# Altium PCB LoRaGW_MiniPCIe.PcbDoc (part 1 of 3)
Units mm, origin at the board's own origin, x right, y up, seen from the top; angles counter-clockwise.
Board outline 30.02 x 79.66 mm, 4 copper layers (Top Layer, GND, PWR, Bottom Layer), stack 1.586 mm thick; 138 components, 116 nets, 568 pads, 433 vias.
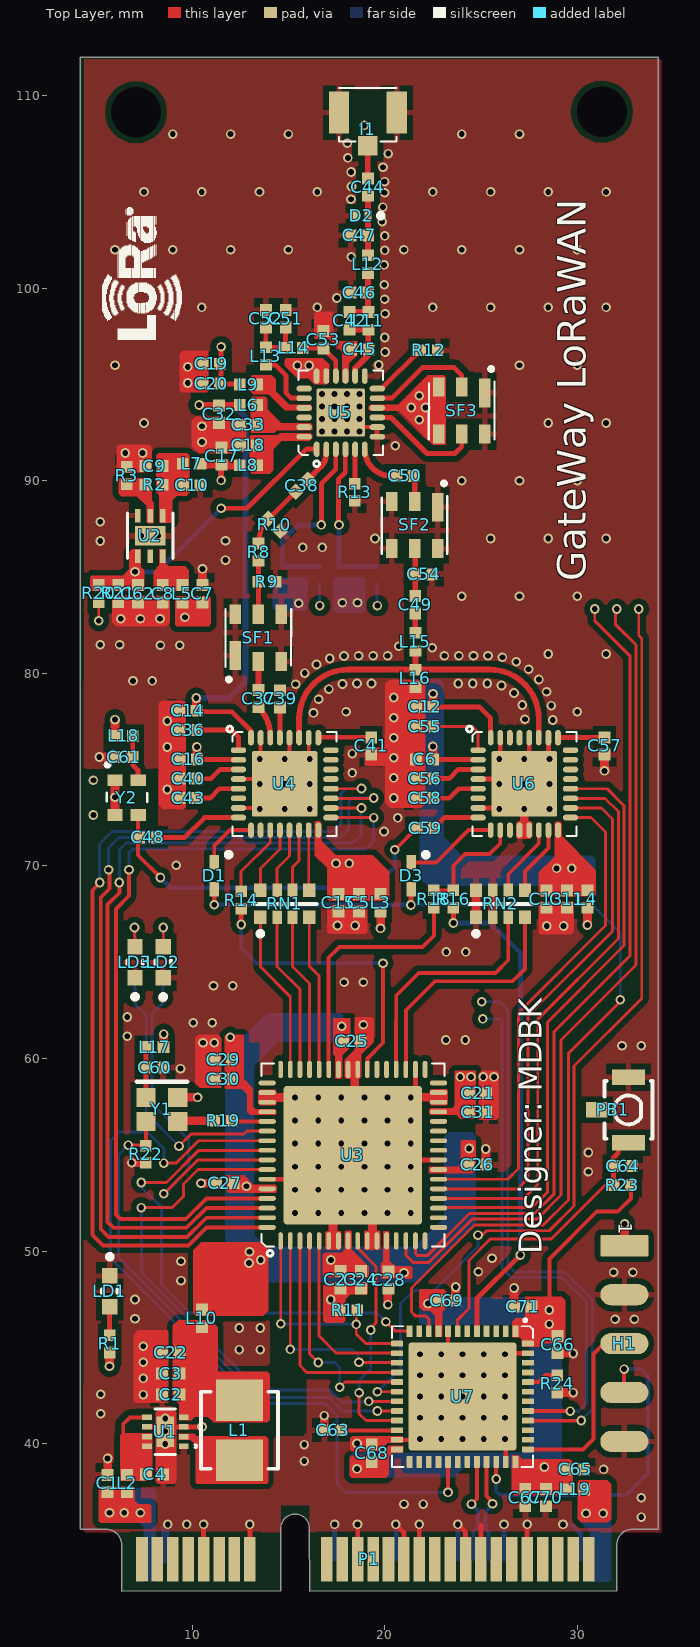
[diagram p0: Top Layer view]
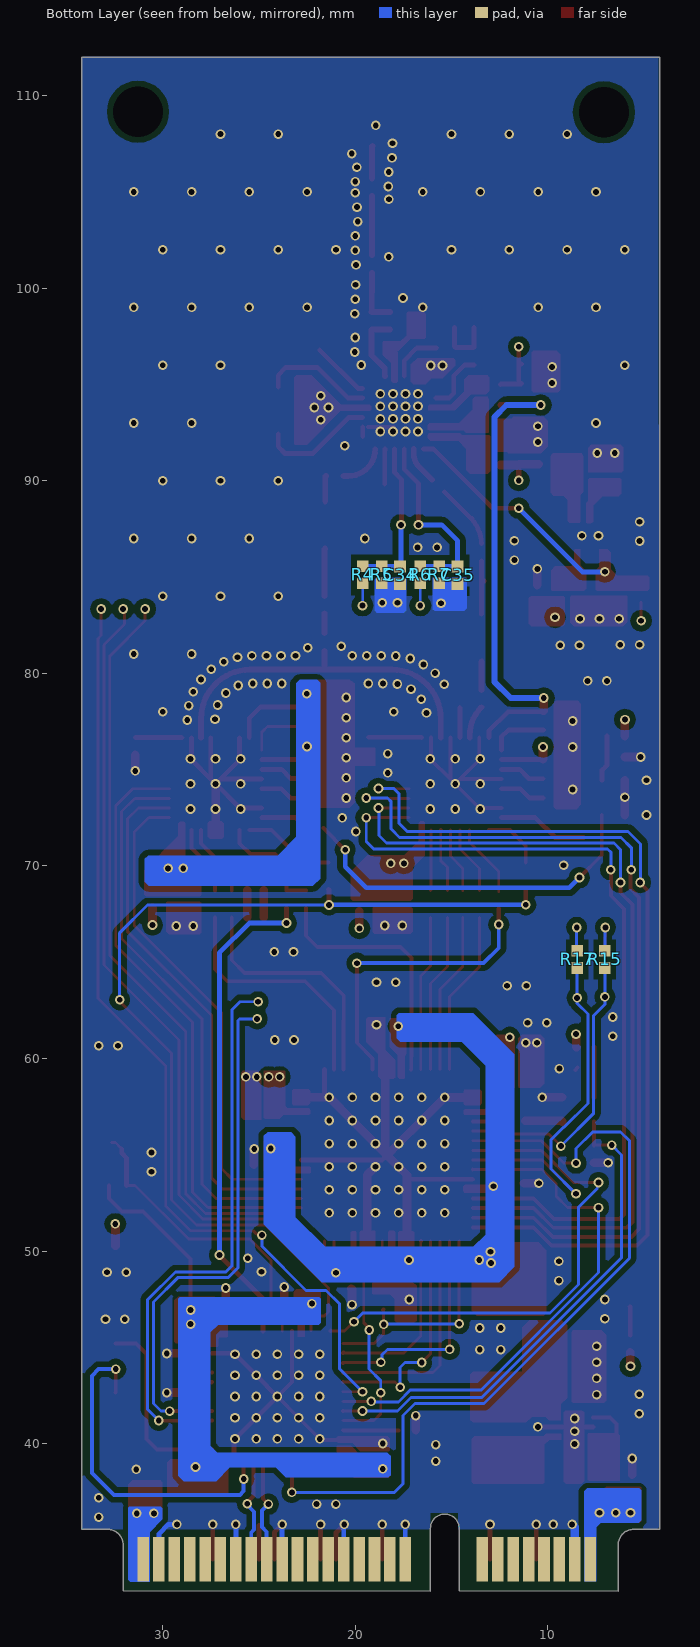
[diagram p1: Bottom Layer view, seen from below]
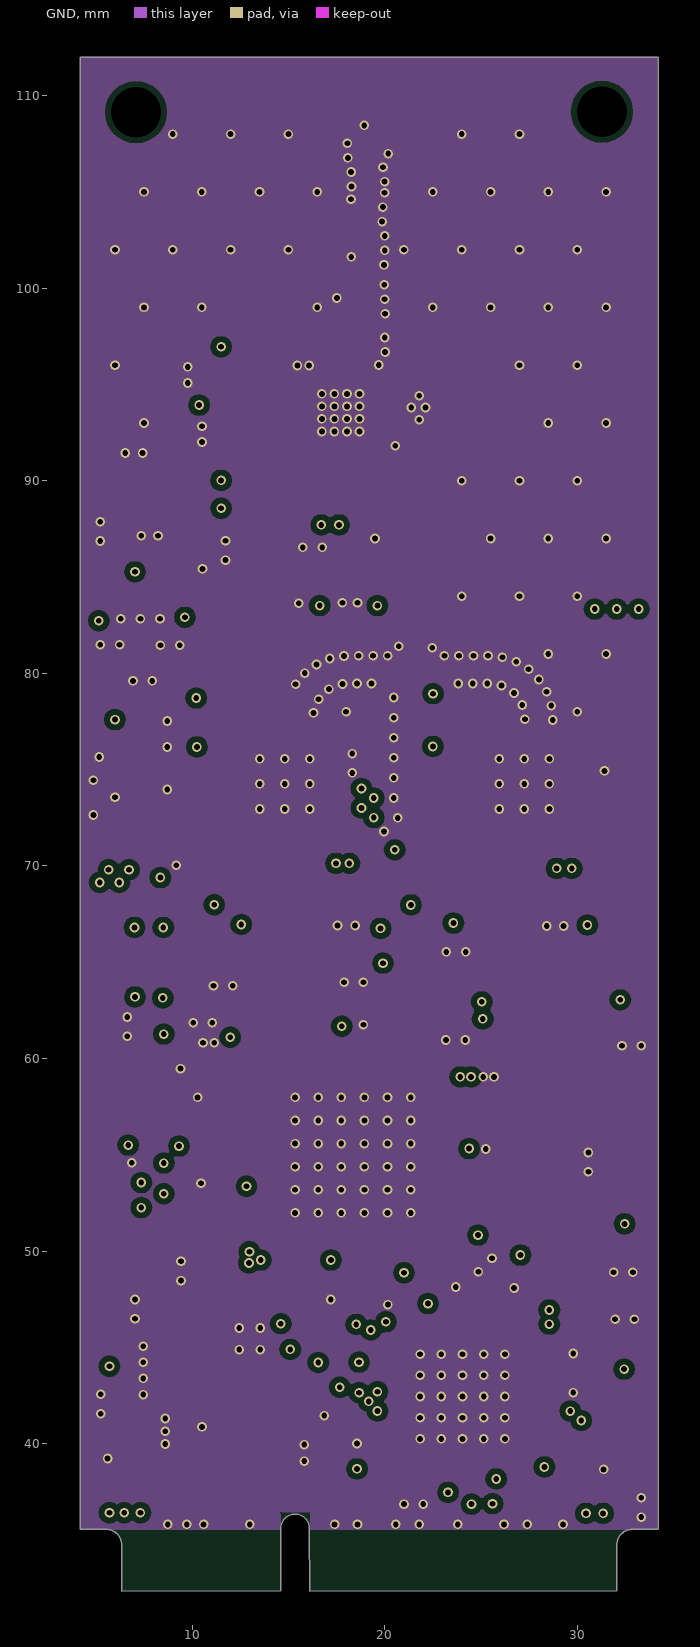
[diagram p2: GND]
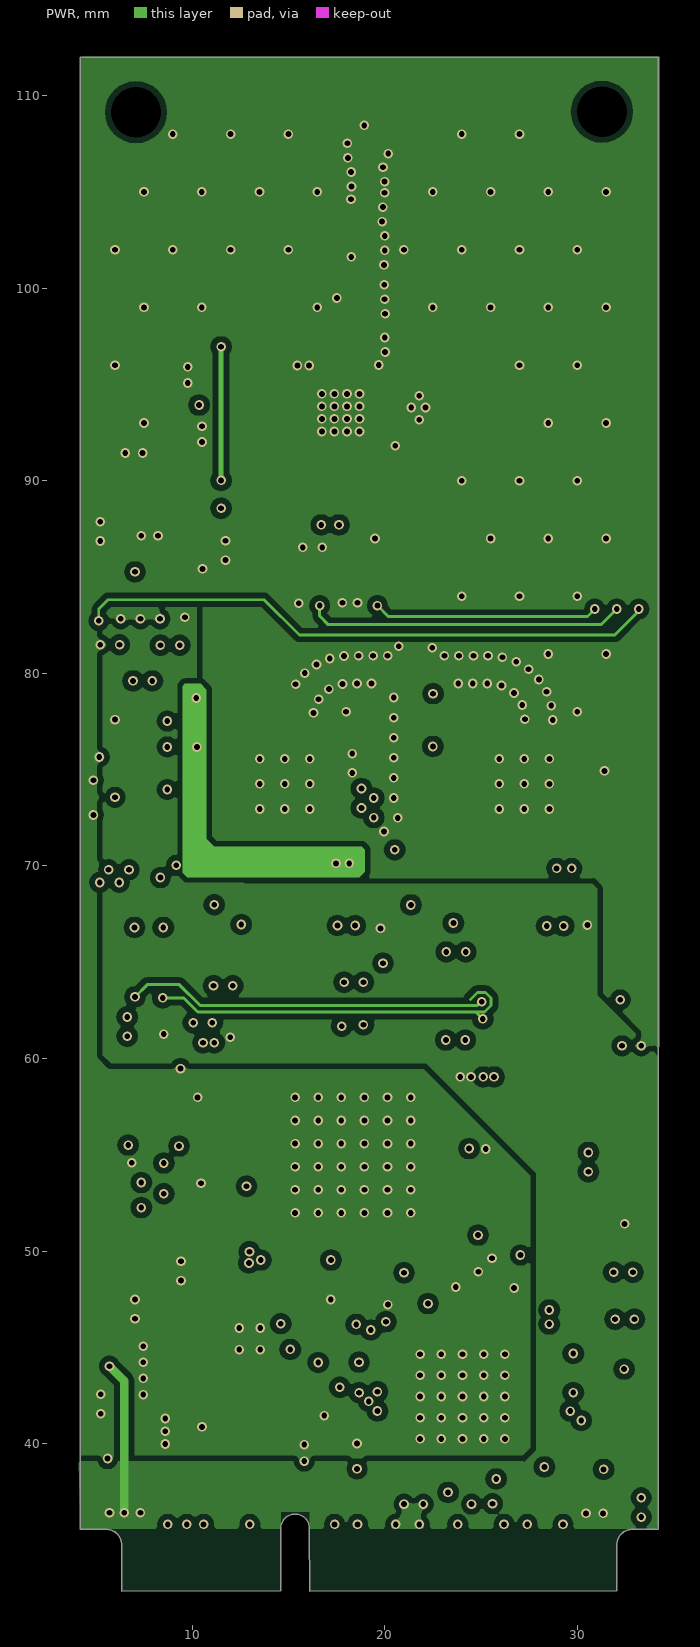
[diagram p3: PWR]
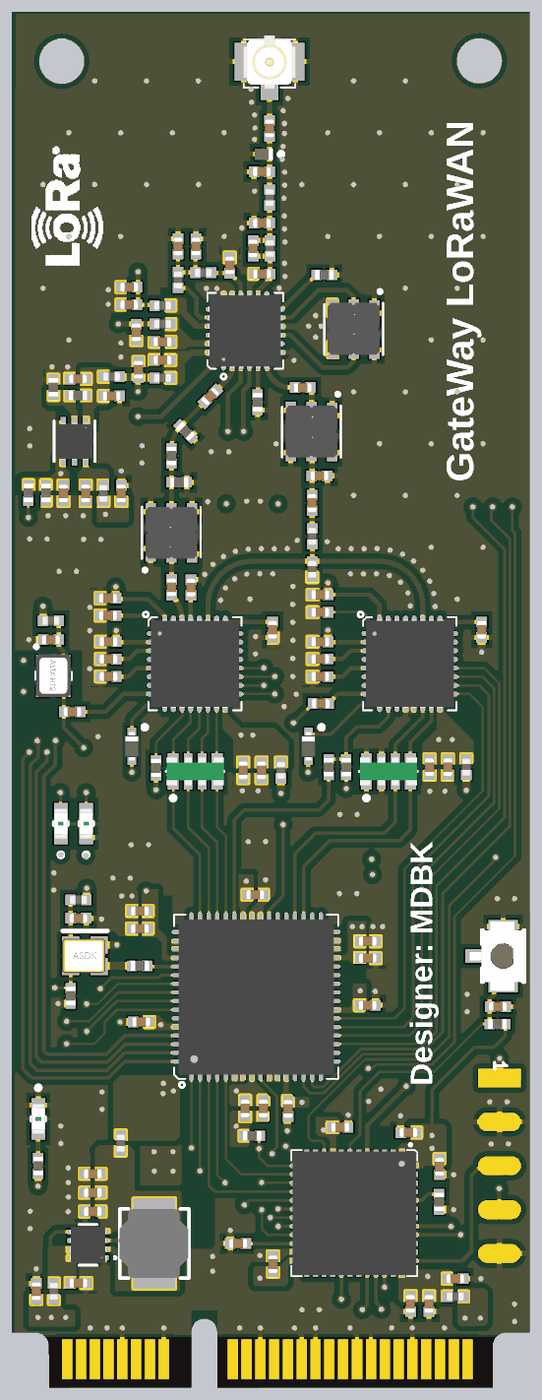
[diagram p5: 3D render of the assembled board from above, using the file's embedded part models]
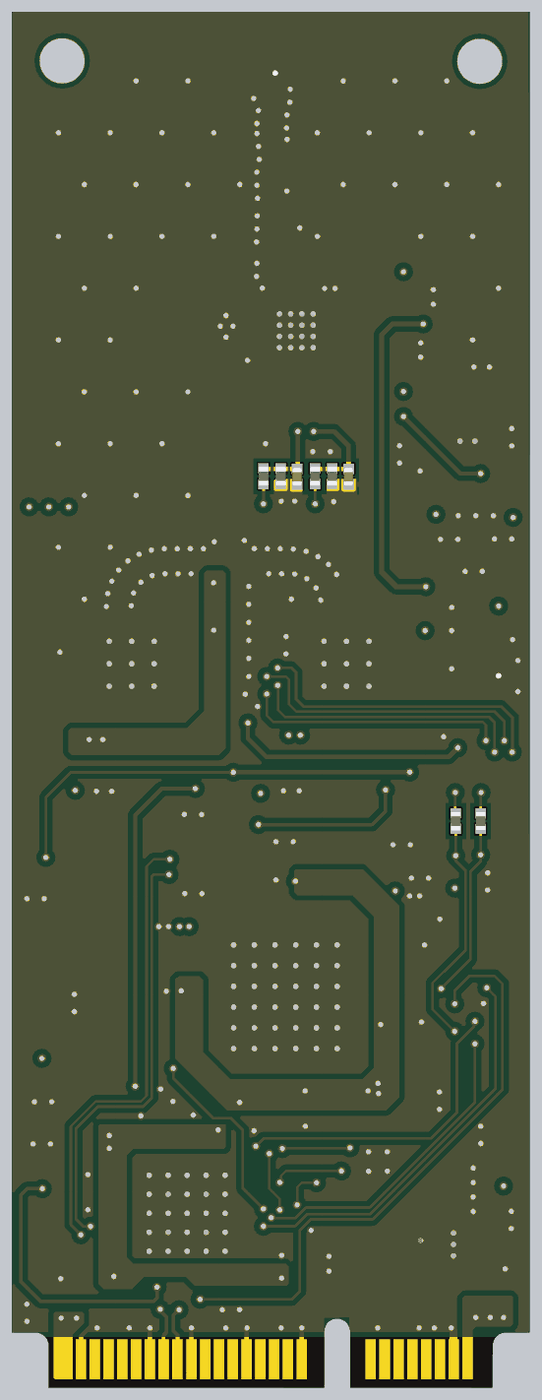
[diagram p6: 3D render of the assembled board from below, using the file's embedded part models]

## Layer stack, top to bottom
Top Solder: solder mask 0.01, SM-001, Dk 4.6
Top Layer: signal copper 0.035
Dielectric 1: core 0.15, FR-4, Dk 4.6
GND: signal copper 0.018
Dielectric 3: prepreg 1.18, FR-4, Dk 4.6
PWR: signal copper 0.018
Dielectric 5: core 0.15, FR-4, Dk 4.6
Bottom Layer: signal copper 0.035
Bottom Solder: solder mask 0.01, SM-001, Dk 4.6

## Board outline
6.35,32.343 6.343,34.75 ccw(c5.55,34.75) 5.55,35.543 4.2,35.543 4.189,111.996 34.196,112.003 34.207,35.55 32.85,35.543 ccw(c32.85,34.75) 32.057,34.75 32.057,32.35 16.1,32.343 16.093,35.6 ccw(c15.35,35.6) 14.607,35.6 14.607,32.35

## Design rules (kind name [scope] priority, off if disabled: settings)
Clearance [All] p1: gap=0.15 ignorepadtopadclearanceinfootprint=FALSE except(0: Arc-Hole Track-Hole SMDPad-Hole THPad-Hole Via-Hole Fill-Hole Poly-Hole Region-Hole Text-Hole; 0.3: Arc-Poly Track-Poly SMDPad-Poly THPad-Poly Via-Poly Fill-Poly Poly-Poly Poly-Region)
ComponentClearance [All] p1: gap=0.1 collisioncheckmode=3 verticalgap=0.1 showdistances=FALSE
PlaneClearance [All] p1: clearance=0.3
PlaneConnect [All] p1: planeconnectstyle=Relief reliefexpansion=0.2 reliefentries=4 reliefconductorwidth=0.3 reliefairgap=0.2
PolygonConnect PolygonConnect_1 [isvia or InComponent('J4') or InComponent('J5')] p1: connectstyle=Direct reliefconductorwidth=0.3 reliefentries=4 polygonreliefangle="90 Angle" airgapwidth=0.3
PolygonConnect [All] p2: connectstyle=Relief reliefconductorwidth=0.3 reliefentries=4 polygonreliefangle="90 Angle" airgapwidth=0.3
RoutingVias [All] p1: holewidth=0.45 width=0.254 viastyle="Through Hole" minholewidth=0.152 minwidth=0.254 maxholewidth=0.6 maxwidth=1.1
SolderMaskExpansion [All] p1: expansion=0.102
Width [All] p1: maxlimit=1.5 minlimit=0.15 preferedwidth=0.2
27 further rules are at their usual default settings.

## Classes and differential pairs
component class [03].PCIe: C63 C64 C66 C68 C69 C70 C71 DS1 H1 L19 P1 PB1 R1 R20 R23 U7
component class [02].LORA: C11 C14 C16 C17 C19 C21 C22 C24 C27 C29 C30 C32 C35 C37 C38 C43 C44 C46 C49 C51 C52 C54 C57 C63 C64 C66 C69 D1 D2 D3 I1 L6 L7 L8 L9 L10 L11 L12 L13 L14 L15 L16 L17 L18 LD2 LD3 R4 R7 R9 R12 R14 R17 R20 RN1 RN2 SF1 SF2 SF3 U3 U4 U5 U6 Y1 Y2
component class [01].PSU: C4 C6 C8 C11 C14 C16 C17 L1 L2 L3 L4 L5 LD1 R4 U1 U2

## Components (designator, comment, footprint, x,y, rotation, side; value= is the part's Value field where it differs from the comment)
C1 "1uF" CAPC1005X55N 5.613,37.928 r270 top
C2 "1uF" CAPC1005X55N 8.89,42.544 r0 top
C3 "1uF" CAPC1005X55N 8.89,43.634 r0 top
C4 "1uF" CAPC1005X55N 8.052,38.405 r180 top
C5 "1uF" CAPC1005X55N 18.667,68.088 r90 top
C6 "1uF" CAPC1005X55N 22.073,75.531 r0 top
C7 "1uF" CAPC1005X55N 10.541,84.125 r270 top
C8 "1uF" CAPC1005X55N 8.476,84.125 r90 top
C9 "1uF" CAPC1005X55N 8.026,90.754 r0 top
C10 "1uF" CAPC1005X55N 9.979,89.764 r180 top
C11 "100nF" CAPC1005X55N 29.464,68.275 r90 top
C12 "100nF" CAPC1005X55N 22.073,78.257 r0 top
C13 "100nF" CAPC1005X55N 28.397,68.275 r90 top
C14 "100nF" CAPC1005X55N 9.775,78.054 r0 top
C15 "100nF" CAPC1005X55N 17.6,68.088 r90 top
C16 "100nF" CAPC1005X55N 9.8,75.535 r0 top
C17 "4.7uF" CAPC1005X55N 11.532,91.28 r270 top
C18 "150pF" CAPC1005X55N 12.929,91.836 r0 top
C19 "1nF" CAPC1005X55N 10.998,96.063 r0 top
C20 "33pF" CAPC1005X55N 10.998,95.047 r0 top
C21 "10uF" CAPC1005X55N 24.822,58.191 r180 top
C22 "10uF" CAPC1005X55N 8.89,44.729 r0 top
C23 "1uF" CAPC1005X55N 17.71,48.514 r90 top
C24 "100nF" CAPC1005X55N 18.771,48.514 r90 top
C25 "100nF" CAPC1005X55N 18.298,60.884 r180 top
C26 "100nF" CAPC1005X55N 24.816,54.483 r180 top
C27 "100nF" CAPC1005X55N 11.692,53.518 r0 top
C28 "100nF" CAPC1005X55N 20.2,48.489 r90 top
C29 "100nF" CAPC1005X55N 11.615,59.944 r0 top
C30 "100nF" CAPC1005X55N 11.615,58.928 r0 top
C31 "100nF" CAPC1005X55N 24.823,57.217 r180 top
C32 "10nF" CAPC1005X55N 11.405,93.447 r90 top
C33 "22pF" CAPC1005X55N 12.929,92.895 r0 top
C34 "56pF" CAPC1005X55N 17.672,85.09 r90 bottom
C35 "56pF" CAPC1005X55N 14.685,85.09 r90 bottom
C36 "10uF" CAPC1005X55N 9.775,77.048 r0 top
C37 "56pF" CAPC1005X55N 13.45,78.687 r90 top
C38 "3.3pF" CAPC1005X55N 15.697,89.738 r45 top
C39 "56pF" CAPC1005X55N 14.574,78.671 r90 top
C40 "1uF" CAPC1005X55N 9.8,74.529 r0 top
C41 "1uF" CAPC1005X55N 19.304,76.225 r90 top
C42 "33pF" CAPC1005X55N 18.178,98.301 r90 top
C43 "1uF" CAPC1005X55N 9.8,73.523 r0 top
C44 "33pF" CAPC1005X55N 19.125,105.25 r90 top
C45 "33pF" CAPC1005X55N 18.701,96.825 r0 top
C46 "33pF" CAPC1005X55N 18.683,99.771 r0 top
C47 "33pF" CAPC1005X55N 18.683,102.743 r0 top
C48 "1uF" CAPC1005X55N 7.699,71.476 r0 top
C49 "56pF" CAPC1005X55N 21.59,83.566 r90 top
C50 "56pF" CAPC1005X55N 21.057,90.246 r180 top
C51 "33pF" CAPC1005X55N 14.864,98.418 r270 top
C52 "33pF" CAPC1005X55N 13.828,98.418 r270 top
C53 "33pF" CAPC1005X55N 16.823,97.326 r270 top
C54 "5.6pF" CAPC1005X55N 22.022,85.141 r180 top
C55 "10uF" CAPC1005X55N 22.073,77.237 r0 top
C56 "1uF" CAPC1005X55N 22.073,74.535 r0 top
C57 "1uF" CAPC1005X55N 31.42,76.225 r90 top
C58 "1uF" CAPC1005X55N 22.073,73.515 r0 top
C59 "1uF" CAPC1005X55N 22.1,71.958 r0 top
C60 "100nF" CAPC1005X55N 8.055,59.523 r180 top
C61 "100nF" CAPC1005X55N 6.46,75.653 r0 top
C62 "56pF" CAPC1005X55N 7.189,84.125 r90 top
C63 "4.7nF" CAPC1005X55N 17.307,40.693 r0 top
C64 "100nF" CAPC1005X55N 32.36,54.407 r180 top
C65 "100nF" CAPC1005X55N 29.896,38.659 r180 top
C66 "100nF" CAPC1005X55N 28.981,45.143 r90 top
C67 "4.7nF" CAPC1005X55N 27.301,37.196 r90 top
C68 "100nF" CAPC1005X55N 19.329,39.497 r270 top
C69 "100nF" CAPC1005X55N 23.223,47.422 r180 top
C70 "100nF" CAPC1005X55N 28.367,37.196 r90 top
C71 "100nF" CAPC1005X55N 27.178,47.117 r0 top
D1 "PMEG4002EB" SODFL1608X65N 11.148,69.48 r270 top
D2 "ESD5V3L1U-02LRH" DFN100X60X40-2N 18.796,103.759 r180 top
D3 "PMEG4002EB" SODFL1608X65N 21.387,69.48 r270 top
H1 "HDR5" HDR5 32.451,50.273 r270 top
I1 "ANTEN_IPEX" ANTEN_IPEX 19.126,107.391 r90 top
L1 "LQH44PN1R0NP0L" Inductor_1uH 12.421,40.693 r90 top
L2 "600R@100MHz" INDC1005X55N 6.629,37.928 r90 top
L3 "600R@100MHz" INDC1005X55N 19.791,68.088 r90 top
L4 "600R@100MHz" INDC1005X55N 30.531,68.275 r90 top
L5 "600R@100MHz" INDC1005X55N 9.5,84.125 r90 top
L6 "1k@100MHz" INDC1005X55N 12.929,93.929 r0 top
L7 "600R@100MHz" INDC1005X55N 9.979,90.881 r0 top
L8 "1k@100MHz" INDC1005X55N 12.929,90.805 r0 top
L9 "1k@100MHz" INDC1005X55N 12.929,94.996 r0 top
L10 "600R@100MHz" INDC1005X55N 10.506,46.504 r90 top
L11 "1k@100MHz" INDC1005X55N 19.152,98.301 r90 top
L12 "1k@100MHz" INDC1005X55N 19.133,101.247 r90 top
L13 "1k@100MHz" INDC1005X55N 13.828,96.476 r90 top
L14 "1k@100MHz" INDC1005X55N 15.289,96.901 r0 top
L15 "1k@100MHz" INDC1005X55N 21.6,81.636 r90 top
L16 "1k@100MHz" INDC1005X55N 21.6,79.731 r90 top
L17 "600R@100MHz" INDC1005X55N 8.055,60.589 r180 top
L18 "600R@100MHz" INDC1005X55N 6.46,76.745 r0 top
L19 "600R@100MHz" INDC1005X55N 29.896,37.621 r180 top
LD1 "Green" LED_OSRAM_LGL29K 5.727,47.907 r270 top
LD2 "Green" LED_OSRAM_LGL29K 8.502,64.999 r90 top
LD3 "Green" LED_OSRAM_LGL29K 7.036,64.999 r90 top
P1 "PCIeMini-CN-2S-M-R52" PCIeMini-GF-2D-800-1K-S52 19.2,33.992 r0 top
PB1 "Push Button" PB_OMRON_B3U-1100P 32.664,57.328 r270 top
R1 "470" RESC1005X40N 5.715,45.179 r270 top
R2 "10k" RESC1005X40N 8.026,89.789 r0 top
R3 "10k" RESC1005X40N 6.604,90.264 r270 top
R4 "100" RESC1005X40N 19.613,85.115 r90 bottom
R5 "0" RESC1005X40N 18.617,85.115 r90 bottom
R6 "100" RESC1005X40N 16.626,85.115 r90 bottom
R7 "0" RESC1005X40N 15.631,85.115 r90 bottom
R8 "18" RESC1005X40N 13.45,86.291 r90 top
R9 "300" RESC1005X40N 13.887,84.76 r180 top
R10 "300" RESC1005X40N 14.265,87.706 r135 top
R11 "10k" RESC1005X40N 18.117,46.932 r180 top
R12 "150" RESC1005X40N 22.301,96.774 r0 top
R13 "150" RESC1005X40N 18.44,89.399 r90 top
R14 "100" RESC1005X40N 12.548,68.224 r90 top
R15 "470" RESC1005X40N 7.036,65.145 r90 bottom
R16 "100" RESC1005X40N 23.571,68.275 r90 top
R17 "470" RESC1005X40N 8.48,65.145 r90 bottom
R18 "100" RESC1005X40N 22.555,68.275 r270 top
R19 "0" RESC1005X40N 11.607,56.768 r0 top
R20 "100" RESC1005X40N 5.156,84.15 r90 top
R21 "0" RESC1005X40N 6.172,84.15 r90 top
R22 "10k" RESC1005X40N 7.602,55.027 r90 top
R23 "100k" RESC1005X40N 32.334,53.404 r0 top
R24 "100k" RESC1005X40N 28.957,43.103 r90 top
RN1 "100" RN_VISHAY_ACAS0612 14.815,68.027 r90 top
RN2 "100" RN_VISHAY_ACAS0612 26.016,68.027 r90 top
SF1 "B39871B3717U410" SAW_Filter 13.437,81.915 r90 top
SF2 "B39871B3717U410" SAW_Filter 21.558,87.626 r270 top
SF3 "B39871B3717U410" SAW_Filter 24.003,93.569 r270 top
U1 "TPS62061DSGT" TPS62061 8.611,40.615 r180 top
U2 "TPS73733DRVR" TPS73733DRVR 7.826,87.139 r270 top
U3 "SX1308" SX1308 18.375,55.003 r90 top
U4 "SX1257" SX1257 14.809,74.256 r0 top
U5 "SE2435L" SE2435L 17.717,93.534 r90 top
U6 "SX1257" SX1257 27.254,74.256 r0 top
U7 "STM32" STM32 24.093,42.443 r270 top
Y1 "Oscillator_133MHz" OSCILLATOR_133MHz 8.363,57.343 r0 top
Y2 "Oscillator_32MHz" TCXO_32MHz 6.474,73.567 r270 top

## Footprints (in the part's own frame and the unit in brackets; to place one, negate y for a bottom-side part, rotate by r counter-clockwise, add the part's x,y. Pads: shape width x height; smd on the part's side, far side on the other; paste and mask are expansions set on the pad)
ANTEN_IPEX [mm]
  rect 1x1 smd: 1(0,0)
  rect 2.2x1.05 smd: 2(1.727,-1.5) 2(1.727,1.5)
  Top Layer pour cut-out: 0.635,0.762 0.635,-0.762 2.921,-0.762 2.921,0.762
  silkscreen extent 0.23,-1.5 3,1.5, body extent 0.15,-1.5 3.25,1.5, height 1.25
CAPC1005X55N [mm] "Chip Capacitor, Body 1.0x0.55mm, IPC Medium Density"
  rect 0.62x0.62 smd: 1(-0.45,0) 2(0.45,0)
  body extent -0.52,-0.27 0.53,0.28, height 0.55
DFN100X60X40-2N [mm] "DFN; 2 pin,1.00mm L X 0.60mm W X 0.40mm H, IPC Medium Density"
  rect 0.36x0.62 smd: 1(-0.33,0) 2(0.33,0)
  silkscreen extent -1.13,-0.12 -0.88,0.12, body extent -0.52,-0.32 0.53,0.33, height 0.4
HDR5 [mm]
  rrect10% 1.1x2.5 smd paste-3 mask+0.05: 1(0,0)
  oval 1.1x2.5 smd paste-3 mask+0.05: 2(2.54,0) 3(5.08,0) 4(7.62,0) 5(10.16,0)
INDC1005X55N [mm] "Chip Inductor, 2-Leads, EIA 0402, Metric 1005, Body 1x0.5mm, 0402IPC Medium Density"
  rect 0.6x0.62 smd: 1(-0.46,0) 2(0.46,0)
  body extent -0.52,-0.27 0.53,0.28, height 0.55
Inductor_1uH [mm]
  rect 2.15x2.45 smd: 1(-1.55,-0.034) 2(1.55,-0.034)
  silkscreen extent -2,-2.03 2,1.97, body extent -2,-2 2,2, height 1.7
LED_OSRAM_LGL29K [mm] "Green Chip LED, 2-Leads, Body 1.7x0.8mm, IPC Medium Density"
  rect 0.8x0.8 smd: 1(-0.8,0) 2(0.8,0)
  silkscreen extent -1.92,-0.4 0.1,0.4, body extent -0.85,-0.4 0.85,0.4, height 0.67
OSCILLATOR_133MHz [mm]
  rect 1x1 smd: 1(-0.761,-0.615) 2(0.889,0.635) 3(0.889,-0.615) 4(-0.761,0.635)
  silkscreen extent -1.22,1.45 1.37,1.45, body extent -1.25,-1 1.25,1, height 0.96
PB_OMRON_B3U-1100P [mm] "Body 1.2x3x2.5mm Ultra-Small Tactile Pushbutton Switch, (with Ground Terminal), OMRON B3U Series"
  rect 0.8x1.7 smd: 1(-1.7,0) 2(1.7,0)
  rect 0.8x1.1 smd: 3(0,-1.65)
  silkscreen extent -1.5,-1.25 1.5,1.25, body extent -2,-1.95 2,1.25, height 1.75
PCIeMini-GF-2D-800-1K-S52 [mm] "Golden finger, PCIeMini, Dual, Staggered, Pitch 0.8mm, 52-Position"
  rect 0.6x2.3 smd paste-0.9: 1(-11.8,0) 3(-11,0) 5(-10.2,0) 7(-9.4,0) 9(-8.6,0) 11(-7.8,0) 13(-7,0) 15(-6.2,0) 17(-2.2,0) 19(-1.4,0) 21(-0.6,0) 23(0.2,0) 25(1,0) 27(1.8,0) 29(2.6,0) 31(3.4,0) 33(4.2,0) 35(5,0) 37(5.8,0) 39(6.6,0) 41(7.4,0) 43(8.2,0) 45(9,0) 47(9.8,0) 49(10.6,0) 51(11.4,0)
  rect 0.6x2.3 smd far side paste-0.9: 2(-11.4,0) 4(-10.6,0) 6(-9.8,0) 8(-9,0) 10(-8.2,0) 12(-7.4,0) 14(-6.6,0) 16(-5.8,0) 18(-1.8,0) 20(-1,0) 22(-0.2,0) 24(0.6,0) 26(1.4,0) 28(2.2,0) 30(3,0) 32(3.8,0) 34(4.6,0) 36(5.4,0) 38(6.2,0) 40(7,0) 42(7.8,0) 44(8.6,0) 46(9.4,0) 48(10.2,0) 50(11,0) 52(11.8,0)
RESC1005X40N [mm] "Chip Resistor, EIA 0402, Metric 1005, Body 1.0x0.5mm, IPC Medium Density"
  rect 0.6x0.6 smd: 1(-0.45,0) 2(0.45,0)
  body extent -0.52,-0.27 0.53,0.28, height 0.4
RN_VISHAY_ACAS0612 [mm] "Resistor, Chip Array, Convex S Version, Pitch 0.80mm, 8-Leads,1.5x3.2mm, VISHAY Type ACAS 0612, IPC Medium Density"
  rect 0.7x0.64 smd: 1(-0.7,1.27) 4(-0.7,-1.27) 5(0.7,-1.27) 8(0.7,1.27)
  rect 0.7x0.5 smd: 2(-0.7,0.4) 3(-0.7,-0.4) 6(0.7,-0.4) 7(0.7,0.4)
  silkscreen extent -1.67,-1.65 0,1.65, body extent -0.8,-1.65 0.8,1.65, height 0.55
SAW_Filter [mm]
  rect 1.5x0.6 smd: 1(-0.995,1.2)
  rect 1x0.6 smd: 2(-1.3,0) 3(-1.3,-1.2) 4(1.148,-1.2) 5(1.148,0) 6(1.148,1.2)
  silkscreen extent -2.34,-1.7 1.43,1.7, body extent -1.58,-1.5 1.42,1.5, height 1.02
SE2435L [mm]
  oval 0.8x0.3 smd mask+0.05: 1(-1.9,1.25) 2(-1.9,0.75) 3(-1.9,0.25) 4(-1.9,-0.25) 5(-1.9,-0.75) 6(-1.9,-1.25) 13(1.9,-1.25) 14(1.9,-0.75) 15(1.9,-0.25) 16(1.9,0.25) 17(1.9,0.75) 18(1.9,1.25)
  oval 0.3x0.8 smd mask+0.05: 7(-1.25,-1.9) 8(-0.75,-1.9) 9(-0.25,-1.9) 10(0.25,-1.9) 11(0.75,-1.9) 12(1.25,-1.9) 19(1.25,1.9) 20(0.75,1.9) 21(0.25,1.9) 22(-0.25,1.9) 23(-0.75,1.9) 24(-1.25,1.9)
  rrect5% 2.5x2.5 smd paste-2.5 mask+0.05: 25(0,0)
  silkscreen extent -2.8,-2.2 2.2,2.2, body extent -2.13,-2.13 2.13,2.13, height 1
SODFL1608X65N [mm] "Ultra Small Outline Diode Flat Lead (SOD-523), Body; 1.2mm L X 0.8mm W X 0.65mm H, IPC Medium Density"
  rect 0.75x0.5 smd: 1(-0.7,0) 2(0.7,0)
  silkscreen extent -1.22,0.63 -0.98,0.88, body extent -0.82,-0.42 0.83,0.43, height 0.65
STM32 [mm]
  rrect10% 0.6x0.3 smd mask+0.05: 1(-3.4,2.7) 2(-3.4,2.2) 3(-3.4,1.7) 4(-3.4,1.2) 5(-3.4,0.7) 6(-3.4,0.2) 7(-3.4,-0.3) 8(-3.4,-0.8) 9(-3.4,-1.3) 10(-3.4,-1.8) 11(-3.4,-2.3) 12(-3.4,-2.8) 25(3.4,-2.8) 26(3.4,-2.3) 27(3.4,-1.8) 28(3.4,-1.3) 29(3.4,-0.8) 30(3.4,-0.3) 31(3.4,0.2) 32(3.4,0.7) 33(3.4,1.2) 34(3.4,1.7) 35(3.4,2.2) 36(3.4,2.7)
  rrect10% 0.3x0.6 smd mask+0.05: 13(-2.75,-3.45) 14(-2.25,-3.45) 15(-1.75,-3.45) 16(-1.25,-3.45) 17(-0.75,-3.45) 18(-0.25,-3.45) 19(0.25,-3.45) 20(0.75,-3.45) 21(1.25,-3.45) 22(1.75,-3.45) 23(2.25,-3.45) 24(2.75,-3.45) 37(2.75,3.35) 38(2.25,3.35) 39(1.75,3.35) 40(1.25,3.35) 41(0.75,3.35) 42(0.25,3.35) 43(-0.25,3.35) 44(-0.75,3.35) 45(-1.25,3.35) 46(-1.75,3.35) 47(-2.25,3.35) 48(-2.75,3.35)
  rrect5% 5.6x5.6 smd paste-5.2 mask+0.05: 49(0,-0.05)
  silkscreen extent -4.04,-3.7 3.65,3.6, body extent -3.58,-3.63 3.58,3.53, height 0.94
SX1257 [mm]
  oval 0.8x0.3 smd mask+0.05: 1(-2.4,1.75) 2(-2.4,1.25) 3(-2.4,0.75) 4(-2.4,0.25) 5(-2.4,-0.25) 6(-2.4,-0.75) 7(-2.4,-1.25) 8(-2.4,-1.75) 17(2.4,-1.75) 18(2.4,-1.25) 19(2.4,-0.75) 20(2.4,-0.25) 21(2.4,0.25) 22(2.4,0.75) 23(2.4,1.25) 24(2.4,1.75)
  oval 0.3x0.8 smd mask+0.05: 9(-1.75,-2.4) 10(-1.25,-2.4) 11(-0.75,-2.4) 12(-0.25,-2.4) 13(0.25,-2.4) 14(0.75,-2.4) 15(1.25,-2.4) 16(1.75,-2.4) 25(1.75,2.4) 26(1.25,2.4) 27(0.75,2.4) 28(0.25,2.4) 29(-0.25,2.4) 30(-0.75,2.4) 31(-1.25,2.4) 32(-1.75,2.4)
  rrect5% 3.4x3.4 smd paste-3.2 mask+0.05: 33(0,0)
  silkscreen extent -3,-2.7 2.7,3, body extent -2.55,-2.55 2.55,2.55, height 0.79
SX1308 [mm]
  oval 0.9x0.25 smd mask+0.05: 1(-4.475,3.775) 2(-4.475,3.275) 3(-4.475,2.775) 4(-4.475,2.275) 5(-4.475,1.775) 6(-4.475,1.275) 7(-4.475,0.775) 8(-4.475,0.275) 9(-4.475,-0.225) 10(-4.475,-0.725) 11(-4.475,-1.225) 12(-4.475,-1.725) 13(-4.475,-2.225) 14(-4.475,-2.725) 15(-4.475,-3.225) 16(-4.475,-3.725) 33(4.425,-3.725) 34(4.425,-3.225) 35(4.425,-2.725) 36(4.425,-2.225) 37(4.425,-1.725) 38(4.425,-1.225) 39(4.425,-0.725) 40(4.425,-0.225) 41(4.425,0.275) 42(4.425,0.775) 43(4.425,1.275) 44(4.425,1.775) 45(4.425,2.275) 46(4.425,2.775) 47(4.425,3.275) 48(4.425,3.775)
  oval 0.25x0.9 smd mask+0.05: 17(-3.775,-4.425) 18(-3.275,-4.425) 19(-2.775,-4.425) 20(-2.275,-4.425) 21(-1.775,-4.425) 22(-1.275,-4.425) 23(-0.775,-4.425) 24(-0.275,-4.425) 25(0.225,-4.425) 26(0.725,-4.425) 27(1.225,-4.425) 28(1.725,-4.425) 29(2.225,-4.425) 30(2.725,-4.425) 31(3.225,-4.425) 32(3.725,-4.425) 49(3.725,4.475) 50(3.225,4.475) 51(2.725,4.475) 52(2.225,4.475) 53(1.725,4.475) 54(1.225,4.475) 55(0.725,4.475) 56(0.225,4.475) 57(-0.275,4.475) 58(-0.775,4.475) 59(-1.275,4.475) 60(-1.775,4.475) 61(-2.275,4.475) 62(-2.775,4.475) 63(-3.275,4.475) 64(-3.775,4.475)
  rrect5% 7.2x7.2 smd paste-6.6 mask+0.05: 65(-0.025,0.025)
  silkscreen extent -5.28,-4.72 4.72,4.78, body extent -4.54,-4.47 4.45,4.52, height 0.94
TCXO_32MHz [mm]
  rect 0.6x0.8 smd: 1(-0.875,-0.475) 2(0.925,-0.475) 3(0.925,0.725) 4(-0.875,0.725)
  silkscreen extent -1.78,-0.96 0.24,1.19, body extent -1.25,-0.87 1.25,1.13, height 0.88
TPS62061 [mm]
  rect 0.5x0.28 smd: 1(-0.95,0.75) 2(-0.95,0.25) 3(-0.95,-0.25) 4(-0.95,-0.75) 5(0.95,-0.75) 6(0.95,-0.25) 7(0.95,0.25) 8(0.95,0.75)
  rect 0.9x1.6 smd: 9(0,0)
  silkscreen extent -1.63,-1.18 0.53,1.18, body extent -1.05,-1.05 1.05,1.05, height 0.8
TPS73733DRVR [mm]
  rect 0.7x0.3 smd: 1(-1.05,0.65) 2(-1.05,0) 3(-1.05,-0.65) 4(1.05,-0.65) 5(1.05,0) 6(1.05,0.65)
  rect 1.016x1.6 smd: 7(0,0)
  silkscreen extent -1.18,-1.18 1.18,1.18, body extent -1.05,-1.05 1.05,1.05, height 0.81

## Part data
C1 C2 C3 C4 C5 C6 C7 C8 C9 C10 C23 C40 C41 C43 C48 C56 C57 C58 C59: library part CC0402_1UF_16V_10%_X5R, "Non-polarised capacitor", Case=0402, Manufacturer=GENERIC, Manufacturer1 ComponentHeight=0.55mm, Manufacturer1 Example=TDK, Manufacturer1 Part Number=C1005X5R1C105KT, Tolerance=±10%, Voltage=16V, Author="CERN DEM JLC", Component Type=Standard, CreateDate=10/25/2012, HelpURL=\\cern.ch\dfs\Applications\Altium\Datasheets\CC0402_X5R_TDK_C.pdf, LatestRevisionDate=10/25/2012, Manufacturer Part Number=CC0402_1UF_16V_10%_X5R, Mounted=Yes, Part Description="SMD Multilayer Chip Ceramic Capacitor", Part Number=CC0402_1UF_16V_10%_X5R, Pin Count=2, SMD=Yes, Socket=No, Status=Preferred, Table="Capacitors SMD", TC=X5R
C11 C12 C13 C14 C15 C16 C24 C25 C26 C27 C28 C29 C30 C31 C60 C61 C64 C65 C66 C68 C69 C70 C71: library part CC0402_100NF_16V_10%_X7R, "Non-polarised capacitor", Case=0402, Manufacturer=GENERIC, Manufacturer1 ComponentHeight=0.55mm, Manufacturer1 Example=PHYCOMP, Manufacturer1 Part Number=223878715649, Tolerance=±10%, Voltage=16V, Author="CERN DEM JLC", Component Type=Standard, CreateDate=12/3/2007, HelpURL=\\cern.ch\dfs\Applications\Altium\Datasheets\CC0402_X7R_PHYCOMP.pdf, LatestRevisionDate=12/3/2007, Manufacturer Part Number=CC0402_100NF_16V_10%_X7R, Mounted=Yes, Part Description="SMD Multilayer Chip Ceramic Capacitor", Part Number=CC0402_100NF_16V_10%_X7R, Pin Count=2, SMD=Yes, Socket=No, Status="Not Recommended", Table="Capacitors SMD", TC=X7R
C17: library part CC0402_4.7UF_4V_20%_X5R, "Non-polarised capacitor", Case=0402, Manufacturer=GENERIC, Manufacturer1 ComponentHeight=0.55mm, Manufacturer1 Example=KEMET, Manufacturer1 Part Number=C0402C475M7PAC, Tolerance=±20%, Voltage=4V, Author="CERN DEM JLC", Component Type=Standard, CreateDate=6/8/2010, HelpURL=\\cern.ch\dfs\Applications\Altium\Datasheets\CC0402_X5R_KEMET.pdf, LatestRevisionDate=6/8/2010, Manufacturer Part Number=CC0402_4.7UF_4V_20%_X5R, Mounted=Yes, Part Description="SMD Multilayer Chip Ceramic Capacitor", Part Number=CC0402_4.7UF_4V_20%_X5R, Pin Count=2, SMD=Yes, Socket=No, Status=Preferred, Table="Capacitors SMD", TC=X5R
C18: library part CC0402_150PF_50V_5%_NP0, "Non-polarised capacitor", Case=0402, Manufacturer=GENERIC, Manufacturer1 ComponentHeight=0.55mm, Manufacturer1 Example=PHYCOMP, Manufacturer1 Part Number=223886915151, Tolerance=±5%, Voltage=50V, Author="CERN DEM JLC", Component Type=Standard, CreateDate=12/3/2007, HelpURL=\\cern.ch\dfs\Applications\Altium\Datasheets\CC0402_NP0_PHYCOMP.pdf, LatestRevisionDate=12/3/2007, Manufacturer Part Number=CC0402_150PF_50V_5%_NP0, Mounted=Yes, Part Description="SMD Multilayer Chip Ceramic Capacitor", Part Number=CC0402_150PF_50V_5%_NP0, Pin Count=2, SMD=Yes, Socket=No, Status="Not Recommended", Table="Capacitors SMD", TC=NP0
C19: library part CC0402_1NF_50V_10%_X7R, "Non-polarised capacitor", Case=0402, Manufacturer=GENERIC, Manufacturer1 ComponentHeight=0.55mm, Manufacturer1 Example=PHYCOMP, Manufacturer1 Part Number=223858715623, Tolerance=±10%, Voltage=50V, Author="CERN DEM JLC", Component Type=Standard, CreateDate=12/3/2007, HelpURL=\\cern.ch\dfs\Applications\Altium\Datasheets\CC0402_X7R_PHYCOMP.pdf, LatestRevisionDate=12/3/2007, Manufacturer Part Number=CC0402_1NF_50V_10%_X7R, Mounted=Yes, Part Description="SMD Multilayer Chip Ceramic Capacitor", Part Number=CC0402_1NF_50V_10%_X7R, Pin Count=2, SMD=Yes, Socket=No, Status="Not Recommended", Table="Capacitors SMD", TC=X7R
C20 C42 C44 C45 C46 C47 C51 C52 C53: library part CC0402_33PF_50V_5%_NP0, "Non-polarised capacitor", Case=0402, Manufacturer=GENERIC, Manufacturer1 ComponentHeight=0.55mm, Manufacturer1 Example=PHYCOMP, Manufacturer1 Part Number=223886915339, Tolerance=±5%, Voltage=50V, Author="CERN DEM JLC", Component Type=Standard, CreateDate=12/3/2007, HelpURL=\\cern.ch\dfs\Applications\Altium\Datasheets\CC0402_NP0_PHYCOMP.pdf, LatestRevisionDate=12/3/2007, Manufacturer Part Number=CC0402_33PF_50V_5%_NP0, Mounted=Yes, Part Description="SMD Multilayer Chip Ceramic Capacitor", Part Number=CC0402_33PF_50V_5%_NP0, Pin Count=2, SMD=Yes, Socket=No, Status="Not Recommended", Table="Capacitors SMD", TC=NP0
C21 C22 C36 C55: library part CC0603_10UF_6.3V_20%_X5R, "Non-polarised capacitor", Case=0603, Manufacturer=GENERIC, Manufacturer1 ComponentHeight=0.95mm, Manufacturer1 Example=KEMET, Manufacturer1 Part Number=C0603C106M9PAC, Manufacturer Part Number=CC0603_10uF_6.3V_20%_X5R, Tolerance=±20%, Voltage=6.3V, Author="CERN DEM JLC", Component Type=Standard, CreateDate=12/3/2007, HelpURL=\\cern.ch\dfs\Applications\Altium\Datasheets\CC0603_X5R_KEMET.pdf, LatestRevisionDate=12/3/2007, Mounted=Yes, Part Description="SMD Multilayer Chip Ceramic Capacitor", Part Number=CC0603_10UF_6.3V_20%_X5R, Pin Count=2, SMD=Yes, Socket=No, Status=Preferred, Table="Capacitors SMD", TC=X5R
C32: library part CC0402_10NF_25V_10%_X7R, "Non-polarised capacitor", Case=0402, Manufacturer=GENERIC, Manufacturer1 ComponentHeight=0.55mm, Manufacturer1 Example=TDK, Manufacturer1 Part Number=C1005X7R1E103KT, Tolerance=±10%, Voltage=25V, Author="CERN DEM JLC", Component Type=Standard, CreateDate=10/25/2012, HelpURL=\\cern.ch\dfs\Applications\Altium\Datasheets\CC0402_X7R_TDK_C.pdf, LatestRevisionDate=10/25/2012, Manufacturer Part Number=CC0402_10NF_25V_10%_X7R, Mounted=Yes, Part Description="SMD Multilayer Chip Ceramic Capacitor", Part Number=CC0402_10NF_25V_10%_X7R, Pin Count=2, SMD=Yes, Socket=No, Status=Preferred, Table="Capacitors SMD", TC=X7R
C33: library part CC0402_22PF_50V_5%_NP0, "Non-polarised capacitor", Case=0402, Manufacturer=GENERIC, Manufacturer1 ComponentHeight=0.55mm, Manufacturer1 Example=PHYCOMP, Manufacturer1 Part Number=223886915229, Tolerance=±5%, Voltage=50V, Author="CERN DEM JLC", Component Type=Standard, CreateDate=12/3/2007, HelpURL=\\cern.ch\dfs\Applications\Altium\Datasheets\CC0402_NP0_PHYCOMP.pdf, LatestRevisionDate=12/3/2007, Manufacturer Part Number=CC0402_22PF_50V_5%_NP0, Mounted=Yes, Part Description="SMD Multilayer Chip Ceramic Capacitor", Part Number=CC0402_22PF_50V_5%_NP0, Pin Count=2, SMD=Yes, Socket=No, Status="Not Recommended", Table="Capacitors SMD", TC=NP0
C34 C35 C37 C39 C49 C50 C62: library part CC0603_56PF_50V_5%_NP0, "Non-polarised capacitor", Case=0603, Manufacturer=GENERIC, Manufacturer1 ComponentHeight=0.87mm, Manufacturer1 Example=PHYCOMP, Manufacturer1 Part Number=223886715569, Tolerance=±5%, Voltage=50V, Author="CERN DEM JLC", Component Type=Standard, CreateDate=12/3/2007, HelpURL=\\cern.ch\dfs\Applications\Altium\Datasheets\CC0603_NP0_PHYCOMP.pdf, LatestRevisionDate=12/3/2007, Manufacturer Part Number=CC0603_56PF_50V_5%_NP0, Mounted=Yes, Part Description="SMD Multilayer Chip Ceramic Capacitor", Part Number=CC0603_56PF_50V_5%_NP0, Pin Count=2, SMD=Yes, Socket=No, Status=Preferred, Table="Capacitors SMD", TC=NP0
C38: library part CC0402_3.3PF_50V_0.25PF_NP0, "Non-polarised capacitor", Case=0402, Manufacturer=GENERIC, Manufacturer1 ComponentHeight=0.55mm, Manufacturer1 Example=PHYCOMP, Manufacturer1 Part Number=223886915338, Tolerance=±0.25pF, Voltage=50V, Author="CERN DEM JLC", Component Type=Standard, CreateDate=12/3/2007, HelpURL=\\cern.ch\dfs\Applications\Altium\Datasheets\CC0402_NP0_PHYCOMP.pdf, LatestRevisionDate=12/3/2007, Manufacturer Part Number=CC0402_3.3PF_50V_0.25PF_NP0, Mounted=Yes, Part Description="SMD Multilayer Chip Ceramic Capacitor", Part Number=CC0402_3.3PF_50V_0.25PF_NP0, Pin Count=2, SMD=Yes, Socket=No, Status="Not Recommended", Table="Capacitors SMD", TC=NP0
C54: library part CC0603_5.6PF_50V_0.5PF_NP0, "Non-polarised capacitor", Case=0603, Manufacturer=GENERIC, Manufacturer1 ComponentHeight=0.87mm, Manufacturer1 Example=PHYCOMP, Manufacturer1 Part Number=223886715568, Tolerance=±0.5pF, Voltage=50V, Author="CERN DEM JLC", Component Type=Standard, CreateDate=12/3/2007, HelpURL=\\cern.ch\dfs\Applications\Altium\Datasheets\CC0603_NP0_PHYCOMP.pdf, LatestRevisionDate=12/3/2007, Manufacturer Part Number=CC0603_5.6PF_50V_0.5PF_NP0, Mounted=Yes, Part Description="SMD Multilayer Chip Ceramic Capacitor", Part Number=CC0603_5.6PF_50V_0.5PF_NP0, Pin Count=2, SMD=Yes, Socket=No, Status=Preferred, Table="Capacitors SMD", TC=NP0
C63 C67: library part CC0402_4.7NF_16V_10%_X7R, "Non-polarised capacitor", Case=0402, Manufacturer=GENERIC, Manufacturer1 ComponentHeight=0.55mm, Manufacturer1 Example=PHYCOMP, Manufacturer1 Part Number=223878715632, Tolerance=±10%, Voltage=16V, Author="CERN DEM JLC", Component Type=Standard, CreateDate=12/3/2007, HelpURL=\\cern.ch\dfs\Applications\Altium\Datasheets\CC0402_X7R_PHYCOMP.pdf, LatestRevisionDate=12/3/2007, Manufacturer Part Number=CC0402_4.7NF_16V_10%_X7R, Mounted=Yes, Part Description="SMD Multilayer Chip Ceramic Capacitor", Part Number=CC0402_4.7NF_16V_10%_X7R, Pin Count=2, SMD=Yes, Socket=No, Status="Not Recommended", Table="Capacitors SMD", TC=X7R
D1 D3: "Schottky Diode", Case=SOD523, Manufacturer="NXP SEMICONDUCTORS", Power=200mA, Voltage=40V, Author="CERN DEM JMW", ComponentHeight=0.65mm, Component Type=Standard, CreateDate=4/21/2009, Device=PMEG4002EB, HelpURL=\\cern.ch\dfs\Applications\Altium\Datasheets\PMEG4002EB.pdf, LatestRevisionDate=5/7/2009, Manufacturer Part Number=PMEG4002EB, Mounted=Yes, PackageDescription="Ultra Small Outline Diode Flat Lead (SOD-523), Body; 1.2mm L X 0.8mm W X 0.65mm H, IPC Medium Density", Part Description="Very Low VF MEGA Schottky Barrier Rectifier", Part Number=PMEG4002EB, Pin Count=2, SMD=Yes, Socket=No, Table=Diodes
D2: "30kV ESD Low Capacitance TVS Diode", Case=DFN2, Manufacturer=INFINEON, Voltage=5.3V, Author="CERN DEM JLC", ComponentHeight=0.4mm, Component Type=Standard, CreateDate=3/13/2012, Device=ESD5V3L1U-02LRH, HelpURL=\\cern.ch\dfs\Applications\Altium\Datasheets\ESD5V3L1U-02LRH.pdf, LatestRevisionDate=3/13/2012, Manufacturer Part Number=ESD5V3L1U-02LRH, Mounted=Yes, PackageDescription="DFN; 2 pin,1.00mm L X 0.60mm W X 0.40mm H, IPC Medium Density", Part Description="30kV ESD Low Capacitance Uni-Directional TVS Diode", Part Number=ESD5V3L1U-02LRH, Pin Count=2, SMD=Yes, Socket=No, Table=Diodes
I1: "CONN UMC RCPT STR 50 OHM SMD", Case/Package=SMD/SMT, Housing Color=White, Manufacturer=Taoglas, Manufacturer Part Number=RECE.20279.001E.01, Package Quantity=1, Supplier Part Number 1=931-1107-6-ND, Body Material=Brass, Body Plating=Gold, Connector Type="Coaxial,Male Pin", Contact Material=Brass, Contact Plating=Gold, Fastening Type=Snap, Gender=Male, Mount="Surface Mount", Orientation=Straight, Packaging="Tape and Reel", Pricing 1="1=0.75 (USD)", Stock 1=45630, Supplier 1=Digi-Key, Termination=Solder
L1: library part Inductor, "FIXED IND 1UH 2.45A 30 MOHM SMD", Case/Package=1515, Case Code (Metric)=4040, Current Rating=2.45A, DC Resistance (DCR)=30mR, Inductance=1uH, Inductance Tolerance=30%, Manufacturer=Murata, Max DC Current=2.95A, Max Operating Temperature=85°C, Min Operating Temperature=-40°C, Package Quantity=1000, Self Resonant Frequency=90MHz, Supplier Part Number 1=490-5325-1-ND, Test Frequency=100kHz, Case Code (Imperial)=1515, ComponentLink1Description=https://datasheet.ciiva.com/8002/490895-8002800.pdf?src-supplier=Element14, ComponentLink1URL=https://datasheet.ciiva.com/8002/490895-8002800.pdf?src-supplier=Element14, ComponentLink2Description=https://datasheet.ciiva.com/11798/0900766b81022890-11798663.pdf?src-supplier=RSComponents, ComponentLink2URL=https://datasheet.ciiva.com/11798/0900766b81022890-11798663.pdf?src-supplier=RSComponents, ComponentLink3Description=https://datasheet.ciiva.com/18090/getdatasheetpartid-200410-18090136.pdf?src-supplier=Verical, ComponentLink3URL=https://datasheet.ciiva.com/18090/getdatasheetpartid-200410-18090136.pdf?src-supplier=Verical, ComponentLink4Description=https://datasheet.ciiva.com/22732/490895-22732005.pdf?src-supplier=Element14, ComponentLink4URL=https://datasheet.ciiva.com/22732/490895-22732005.pdf?src-supplier=Element14, ComponentLink5Description=https://datasheet.ciiva.com/17277/l0075s0103lqh44p-p0-17277735.pdf?src-supplier=Avnet+Europe, ComponentLink5URL=https://datasheet.ciiva.com/17277/l0075s0103lqh44p-p0-17277735.pdf?src-supplier=Avnet+Europe, ComponentLink6Description=https://datasheet.ciiva.com/8506/l0075s0103lqh44p-p0-8506826.pdf?src-supplier=Avnet, ComponentLink6URL=https://datasheet.ciiva.com/8506/l0075s0103lqh44p-p0-8506826.pdf?src-supplier=Avnet, ComponentLink7Description=https://datasheet.ciiva.com/14124/lqh44pn-eng-ds-14124203.pdf?src-supplier=Distrelec, ComponentLink7URL=https://datasheet.ciiva.com/14124/lqh44pn-eng-ds-14124203.pdf?src-supplier=Distrelec, Composition=Wirewound, Core Material=Ferrite, DC Current=2.45A, Depth=4.2mm, Height=0.9mm, Height - Seated (Max)=0.071inch, Lead Free="Lead Free", Length=4mm, Manufacturer Part Number=LQH44PN1R0NP0L, Military Standard=Not, Mount="Surface Mount", Packaging="Tape and Reel", Pricing 1="1 = 0.43000, 10 = 0.37900, 100 = 0.27080, 500 = 0.22750 (USD)", Radiation Hardening=No, REACH SVHC="No SVHC", RoHS=Yes, Saturation Current=2.95A, Shielding=Shielded, Stock 1=14849, Supplier 1=Digi-Key, Termination=SMD/SMT, Tolerance=30%, Weight=0.003527oz, Width=0.157inch
L2 L3 L4 L5 L7 L10 L17 L18 L19: library part IND0402_MURATA_BLM15HD601SN1, "Inductor", Case=0402, Manufacturer=MURATA, Manufacturer Part Number=BLM15HD601SN1D, Power=300mA, Resistance=0.85R, Tolerance=±25%, Author="CERN DEM JLC", ComponentHeight=0.55mm, Component Type=Standard, CreateDate=2/28/2012, HelpURL=\\cern.ch\dfs\Applications\Altium\Datasheets\IND0402_MURATA_BLM15H.pdf, LatestRevisionDate=2/28/2012, Mounted=Yes, Part Description="SMD EMIFIL Suppression Chip Ferrite Bead", Part Number=IND0402_MURATA_BLM15HD601SN1, Pin Count=2, SMD=Yes, Socket=No, Status=None, Table="Inductors SMD"
L6 L8 L9 L11 L12 L13 L14 L15 L16: library part IND0402_MURATA_BLM15HD102SN1, "Inductor", Case=0402, Manufacturer=MURATA, Manufacturer Part Number=BLM15HD102SN1D, Power=250mA, Resistance=1.25R, Tolerance=±25%, Author="CERN DEM JLC", ComponentHeight=0.55mm, Component Type=Standard, CreateDate=3/6/2012, HelpURL=\\cern.ch\dfs\Applications\Altium\Datasheets\IND0402_MURATA_BLM15H.pdf, LatestRevisionDate=3/6/2012, Mounted=Yes, Part Description="SMD EMIFIL Suppression Chip Ferrite Bead", Part Number=IND0402_MURATA_BLM15HD102SN1, Pin Count=2, SMD=Yes, Socket=No, Status=None, Table="Inductors SMD"
LD1 LD2 LD3: library part "LED_OSRAM_LG L29K-G2J1-24-Z", "LED Green 1C 2A", Case=0603, Manufacturer=OSRAM, Manufacturer Part Number="LG L29K-G2J1-24-Z", Author="CERN DEM JLC", Color=Green, ComponentHeight=0.67mm, Component Type=Standard, CreateDate=4/24/2012, HelpURL=\\cern.ch\dfs\Applications\Altium\Datasheets\LED_OSRAM_LGL29K.pdf, LatestRevisionDate=4/24/2012, Mounted=Yes, PackageDescription="Green Chip LED, 2-Leads, Body 1.7x0.8mm, IPC Medium Density", Part Description="Surface Mount Green LED (0603 Case)", Part Number="LED_OSRAM_LG L29K-G2J1-24-Z", Pin Count=2, SMD=Yes, Socket=No, Table="LEDs & Displays"
P1: library part CMP-0001-00067-2, "Golden finger, PCIeMini, Dual, Staggered, Pitch 0.8mm, 52-Position", Package Reference=PCIeMini-GF-2D-800-1K-S52, Package Version="rev1.2, Oct-2007", ClassName="Edge Connector", Datasheet Version="Revision 1.2 Oct-2007", Mating Connector=Tyco-292443-1, Publisher=Altium, System=Connector
PB1: library part PB_OMRON_B3U-1100P, "Push-Button Switch SPDT", Manufacturer=OMRON, Author="CERN DEM JLC", ComponentHeight=1.75mm, Component Type=Standard, CreateDate=3/16/2010, Family="Push Button", HelpURL=\\cern.ch\dfs\Applications\Altium\Datasheets\PB_OMRON_B3U-1100P.pdf, LatestRevisionDate=3/16/2010, Manufacturer Part Number=PB_OMRON_B3U-1100P, Mounted=Yes, PackageDescription="Body 1.2x3x2.5mm Ultra-Small Tactile SPST Pushbutton Switch, (with Ground Terminal), OMRON B3U Series", Part Description="3x2.5mm Ultra-Small Tactile SPST Pushbutton Switch (with Ground Terminal),Contact Rating 50mA 12VDC, B3U Serie", Part Number=PB_OMRON_B3U-1100P, Pin Count=3, SMD=Yes, Socket=No, Status=None, Table=Switches
R1 R15 R17: library part R0402_470R_1%_0.0625W_100PPM, "Resistor - 1%", Case=0402, Manufacturer=GENERIC, Manufacturer1 ComponentHeight=0.4mm, Manufacturer1 Example="YAGEO PHYCOMP", Manufacturer1 Part Number=232270674701L, Power=0.0625W, Tolerance=±1%, Author="CERN DEM JLC", Component Type=Standard, CreateDate=12/3/2007, HelpURL=\\cern.ch\dfs\Applications\Altium\Datasheets\R0402_Phycomp_RC0402.pdf, LatestRevisionDate=10/17/2012, Manufacturer Part Number=R0402_470R_1%_0.0625W_100PPM, Mounted=Yes, Part Description="General Purpose Thick Film Chip Resistor", Part Number=R0402_470R_1%_0.0625W_100PPM, Pin Count=2, SMD=Yes, Socket=No, Status="Not recommended", Table="Resistors SMD", TC=±100ppm/°C
R2 R3 R11 R22: library part R0402_10K_1%_0.0625W_100PPM, "Resistor - 1%", Case=0402, Manufacturer=GENERIC, Manufacturer1 ComponentHeight=0.4mm, Manufacturer1 Example="YAGEO PHYCOMP", Manufacturer1 Part Number=232270671003L, Power=0.0625W, Tolerance=±1%, Author="CERN DEM JLC", Component Type=Standard, CreateDate=12/3/2007, HelpURL=\\cern.ch\dfs\Applications\Altium\Datasheets\R0402_Phycomp_RC0402.pdf, LatestRevisionDate=10/17/2012, Manufacturer Part Number=R0402_10K_1%_0.0625W_100PPM, Mounted=Yes, Part Description="General Purpose Thick Film Chip Resistor", Part Number=R0402_10K_1%_0.0625W_100PPM, Pin Count=2, SMD=Yes, Socket=No, Status="Not recommended", Table="Resistors SMD", TC=±100ppm/°C
R4 R6 R14 R16 R18 R20: library part R0402_100R_1%_0.0625W_100PPM, "Resistor - 1%", Case=0402, Manufacturer=GENERIC, Manufacturer1 ComponentHeight=0.4mm, Manufacturer1 Example="YAGEO PHYCOMP", Manufacturer1 Part Number=232270671001L, Power=0.0625W, Tolerance=±1%, Author="CERN DEM JLC", Component Type=Standard, CreateDate=12/3/2007, HelpURL=\\cern.ch\dfs\Applications\Altium\Datasheets\R0402_Phycomp_RC0402.pdf, LatestRevisionDate=10/17/2012, Manufacturer Part Number=R0402_100R_1%_0.0625W_100PPM, Mounted=Yes, Part Description="General Purpose Thick Film Chip Resistor", Part Number=R0402_100R_1%_0.0625W_100PPM, Pin Count=2, SMD=Yes, Socket=No, Status="Not recommended", Table="Resistors SMD", TC=±100ppm/°C
R5 R7 R19 R21: library part R0402_0R_JUMPER, "Resistor - 1%", Case=0402, Manufacturer=GENERIC, Manufacturer1 ComponentHeight=0.4mm, Manufacturer1 Example="YAGEO PHYCOMP", Manufacturer1 Part Number=232270591001L, Author="CERN DEM JLC", Component Type=Standard, CreateDate=12/3/2007, HelpURL=\\cern.ch\dfs\Applications\Altium\Datasheets\R0402_Phycomp_RC0402.pdf, LatestRevisionDate=10/17/2012, Manufacturer Part Number=R0402_0R_JUMPER, Mounted=Yes, Part Description="1A (0.05R Max DC Resistance) Zero Ohm Jumper", Part Number=R0402_0R_JUMPER, Pin Count=2, SMD=Yes, Socket=No, Status="Not recommended", Table="Resistors SMD"
R8: library part R0402_18R_1%_0.0625W_100PPM, "Resistor - 1%", Case=0402, Manufacturer=GENERIC, Manufacturer1 ComponentHeight=0.4mm, Manufacturer1 Example="YAGEO PHYCOMP", Manufacturer1 Part Number=232270671809L, Power=0.0625W, Tolerance=±1%, Author="CERN DEM JLC", Component Type=Standard, CreateDate=12/3/2007, HelpURL=\\cern.ch\dfs\Applications\Altium\Datasheets\R0402_Phycomp_RC0402.pdf, LatestRevisionDate=10/17/2012, Manufacturer Part Number=R0402_18R_1%_0.0625W_100PPM, Mounted=Yes, Part Description="General Purpose Thick Film Chip Resistor", Part Number=R0402_18R_1%_0.0625W_100PPM, Pin Count=2, SMD=Yes, Socket=No, Status="Not recommended", Table="Resistors SMD", TC=±100ppm/°C
R9 R10: library part R0402_300R_1%_0.0625W_100PPM, "Resistor - 1%", Case=0402, Manufacturer=GENERIC, Manufacturer1 ComponentHeight=0.4mm, Manufacturer1 Example="YAGEO PHYCOMP", Manufacturer1 Part Number=232270673001L, Power=0.0625W, Tolerance=±1%, Author="CERN DEM JLC", Component Type=Standard, CreateDate=12/3/2007, HelpURL=\\cern.ch\dfs\Applications\Altium\Datasheets\R0402_Phycomp_RC0402.pdf, LatestRevisionDate=10/17/2012, Manufacturer Part Number=R0402_300R_1%_0.0625W_100PPM, Mounted=Yes, Part Description="General Purpose Thick Film Chip Resistor", Part Number=R0402_300R_1%_0.0625W_100PPM, Pin Count=2, SMD=Yes, Socket=No, Status="Not recommended", Table="Resistors SMD", TC=±100ppm/°C
R12 R13: library part R0402_150R_1%_0.0625W_100PPM, "Resistor - 1%", Case=0402, Manufacturer=GENERIC, Manufacturer1 ComponentHeight=0.4mm, Manufacturer1 Example="YAGEO PHYCOMP", Manufacturer1 Part Number=232270671501L, Power=0.0625W, Tolerance=±1%, Author="CERN DEM JLC", Component Type=Standard, CreateDate=12/3/2007, HelpURL=\\cern.ch\dfs\Applications\Altium\Datasheets\R0402_Phycomp_RC0402.pdf, LatestRevisionDate=10/17/2012, Manufacturer Part Number=R0402_150R_1%_0.0625W_100PPM, Mounted=Yes, Part Description="General Purpose Thick Film Chip Resistor", Part Number=R0402_150R_1%_0.0625W_100PPM, Pin Count=2, SMD=Yes, Socket=No, Status="Not recommended", Table="Resistors SMD", TC=±100ppm/°C
R23 R24: library part R0402_100K_1%_0.0625W_100PPM, "Resistor - 1%", Case=0402, Manufacturer=GENERIC, Manufacturer1 ComponentHeight=0.4mm, Manufacturer1 Example="YAGEO PHYCOMP", Manufacturer1 Part Number=232270671004L, Power=0.0625W, Tolerance=±1%, Author="CERN DEM JLC", Component Type=Standard, CreateDate=12/3/2007, HelpURL=\\cern.ch\dfs\Applications\Altium\Datasheets\R0402_Phycomp_RC0402.pdf, LatestRevisionDate=10/17/2012, Manufacturer Part Number=R0402_100K_1%_0.0625W_100PPM, Mounted=Yes, Part Description="General Purpose Thick Film Chip Resistor", Part Number=R0402_100K_1%_0.0625W_100PPM, Pin Count=2, SMD=Yes, Socket=No, Status="Not recommended", Table="Resistors SMD", TC=±100ppm/°C
RN1 RN2: library part RN_100R_VISHAY_ACASA1000E1000P100, "DIL8 Resistor Network 4 Isolated Resistor 0.25%", Case=1206, Manufacturer="VISHAY  BEYSCHLAG", Manufacturer Part Number=ACASA1000E1000P100, Power=0.1W, Tolerance=±0.25%, Author="CERN DEM JLC", ComponentHeight=0.55mm, Component Type=Standard, CreateDate=5/12/2011, HelpURL=\\cern.ch\dfs\Applications\Altium\Datasheets\RN_VISHAY_ACAS0612.pdf, LatestRevisionDate=5/12/2011, Mounted=Yes, Part Description="Chip Resistor Array , 4 Isolated Resistor (Convex Terminal), ACAS 0612 Serie", Part Number=RN_100R_VISHAY_ACASA1000E1000P100, Pin Count=8, SMD=Yes, Socket=No, Table="Resistor Networks SMD", TC=±25ppm/°C
SF1 SF2 SF3: library part B3717, "FILTER SAW 866.5MHZ SMD", Case/Package=SMD/SMT, Frequency=866.5MHz, Frequency Tolerance=100ppm, Manufacturer="TDK EPCOS", Max Operating Temperature=125°C, Min Operating Temperature=-40°C, Package Quantity=1, Supplier Part Number 1=29M0920, ComponentLink1Description=https://datasheet.ciiva.com/16552/b3717-16552772.pdf?src-supplier=Avnet+Europe, ComponentLink1URL=https://datasheet.ciiva.com/16552/b3717-16552772.pdf?src-supplier=Avnet+Europe, ComponentLink2Description=https://datasheet.ciiva.com/14132/loepcos-breitbandfiler-b3981-en-14132665.pdf?src-supplier=Distrelec, ComponentLink2URL=https://datasheet.ciiva.com/14132/loepcos-breitbandfiler-b3981-en-14132665.pdf?src-supplier=Distrelec, ComponentLink3Description=https://datasheet.ciiva.com/4548/b3717-58819-4548109.pdf?src-supplier=Mouser, ComponentLink3URL=https://datasheet.ciiva.com/4548/b3717-58819-4548109.pdf?src-supplier=Mouser, ComponentLink4Description=https://datasheet.ciiva.com/1024/b3717-1024476.pdf?src-supplier=Digi-Key, ComponentLink4URL=https://datasheet.ciiva.com/1024/b3717-1024476.pdf?src-supplier=Digi-Key, ComponentLink5Description=https://datasheet.ciiva.com/1024/b3717-1024478.pdf?src-supplier=Digi-Key, ComponentLink5URL=https://datasheet.ciiva.com/1024/b3717-1024478.pdf?src-supplier=Digi-Key, ComponentLink6Description=https://datasheet.ciiva.com/3073/b3717-3073166.pdf?src-supplier=Avnet, ComponentLink6URL=https://datasheet.ciiva.com/3073/b3717-3073166.pdf?src-supplier=Avnet, Contact Plating=Gold, Height=0.043inch, Impedance=50R, Insertion Loss=2.1dB, Length=3mm, Load Impedance=50R, Manufacturer Part Number=B39871B3717U410, Mount="Surface Mount", Number of Pins=6, Packaging="Tape and Reel", Pricing 1="9000 = 0.74900 (USD)", Radiation Hardening=No, RoHS=Yes, Stock 1=0, Supplier 1=Newark, Termination=SMD/SMT, Width=0.118inch
U1: library part TPS62061, "IC REG BUCK 1.8V 1.6A 8WSON", Manufacturer="Texas Instruments", Manufacturer Part Number=TPS62061DSGR, Max Input Voltage=6V, Max Operating Temperature=85°C, Max Output Current=1.6A, Max Output Voltage=1.8V, Min Input Voltage=2.7V, Min Operating Temperature=-40°C, Package Quantity=3000, Quiescent Current=18uA, Switching Frequency=3MHz, ComponentLink1Description=https://datasheet.ciiva.com/2034/tps62061-2034635.pdf?src-supplier=Digi-Key, ComponentLink1URL=https://datasheet.ciiva.com/2034/tps62061-2034635.pdf?src-supplier=Digi-Key, ComponentLink2Description=https://datasheet.ciiva.com/14377/tps62060-14377979.pdf?src-supplier=Avnet, ComponentLink2URL=https://datasheet.ciiva.com/14377/tps62060-14377979.pdf?src-supplier=Avnet, Efficiency=97%, Lead Free="Lead Free", Min Output Voltage=1.8V, Number of Outputs=1, Number of Pins=8, Output Configuration=Positive, Output Current=1.6A, Output Type=Fixed, Output Voltage=1.8V, Packaging="Tape and Reel", Pricing 1="1 = 0.89000, 25 = 0.83000, 100 = 0.79000, 500 = 0.76000, 1000 = 0.72000 (USD)", RoHS=Yes, Stock 1=8836, Supplier 1="Rochester Electronics", Supplier Part Number 1=TPS62061DSGR, Synchronous Rectifier=Yes
U2: library part TPS73733, "IC REG LINEAR 3.3V 1A 6SON", Dropout Voltage=130mV, Manufacturer="Texas Instruments", Max Input Voltage=5.5V, Max Operating Temperature=125°C, Max Output Current=1A, Min Current Limit=1.05A, Min Input Voltage=2.2V, Min Operating Temperature=-40°C, Output Voltage=3.3V, Package Quantity=3000, Power Supply Rejection Ratio (PSRR)=58dB, Quiescent Current=400uA, Supplier Part Number 1=296-40960-1-ND, Accuracy=1%, ComponentLink1Description=http://www.ti.com/lit/ds/symlink/tps73733.pdf?src-supplier=Avnet, ComponentLink1URL=http://www.ti.com/lit/ds/symlink/tps73733.pdf?src-supplier=Avnet, ComponentLink2Description=http://www.ti.com/lit/ds/symlink/tps737.pdf?src-supplier=Digi-Key, ComponentLink2URL=http://www.ti.com/lit/ds/symlink/tps737.pdf?src-supplier=Digi-Key, ComponentLink3Description=http://www.ti.com/lit/gpn/tps737?src-supplier=Mouser, ComponentLink3URL=http://www.ti.com/lit/gpn/tps737?src-supplier=Mouser, ComponentLink4Description=http://www.ti.com/general/docs/lit/getliterature.tsp?genericPartNumber=TPS737&&fileType=pdf&src-supplier=Avnet+Asia, ComponentLink4URL=http://www.ti.com/general/docs/lit/getliterature.tsp?genericPartNumber=TPS737&&fileType=pdf&src-supplier=Avnet+Asia, Contact Plating=Gold, Lead Free="Lead Free", Manufacturer Part Number=TPS73733DRVR, Mount="Surface Mount", Number of Outputs=1, Number of Pins=6, Number of Regulators=1, Output Current=1A, Output Type=Fixed, Packaging="Tape and Reel", Polarity=Positive, Pricing 1="1 = 1.55000, 10 = 1.39200, 100 = 1.11890, 500 = 0.91928, 1000 = 0.76169 (USD)", Radiation Hardening=No, RoHS=Yes, Stock 1=15710, Supplier 1=Digi-Key
U3: "IC DIGITAL BASEBAND LORA", Manufacturer=Semtech, Manufacturer Part Number=SX1308IMLTRT, Supplier Part Number 1=SX1308IMLTRTCT-ND, ComponentLink1Description=https://media.digikey.com/pdf/Data%20Sheets/Semtech%20PDFs/SX1308_Web.pdf?src-supplier=Digi-Key, ComponentLink1URL=https://media.digikey.com/pdf/Data%20Sheets/Semtech%20PDFs/SX1308_Web.pdf?src-supplier=Digi-Key, Pricing 1="1 = 32.76000, 10 = 30.24000, 25 = 27.72000, 100 = 25.62000, 250 = 24.36000 (USD)", RoHS=No, Stock 1=4764, Supplier 1=Digi-Key
U4 U6: "IC RF TXRX 802.15.4 32WFQFN", Current - Receiving=20mA, Current - Transmitting=58mA, Frequency=862MHz, Manufacturer=Semtech, Manufacturer Part Number=SX1257IWLTRT, Max Operating Temperature=85°C, Min Operating Temperature=-40°C, Supplier Part Number 1=SX1257IWLTRTCT-ND, ComponentLink1Description=http://www.mouser.com/ds/2/761/down-766660.pdf?src-supplier=Mouser, ComponentLink1URL=http://www.mouser.com/ds/2/761/down-766660.pdf?src-supplier=Mouser, ComponentLink2Description=http://www.semtech.com/images/datasheet/sx1257.pdf?src-supplier=Digi-Key, ComponentLink2URL=http://www.semtech.com/images/datasheet/sx1257.pdf?src-supplier=Digi-Key, ComponentLink3Description=https://www.semtech.com/uploads/documents/DS_SX1257_V1.2.pdf?src-supplier=Digi-Key, ComponentLink3URL=https://www.semtech.com/uploads/documents/DS_SX1257_V1.2.pdf?src-supplier=Digi-Key, Interface=SPI, Lead Free="Lead Free", Number of GPIO=4, Packaging="Tape and Reel", Pricing 1="1 = 7.56000, 10 = 6.93000, 25 = 6.30000, 100 = 5.67000, 250 = 5.19752, 500 = 4.72500, 1000 = 4.25250 (USD)", RoHS=Yes, Stock 1=2577, Supplier 1=Digi-Key
U5: "IC FRONT END 930MHZ ISM 24QFN", Case/Package=QFN, Frequency=930MHz, Manufacturer="Skyworks Solutions", Manufacturer Part Number=SE2435L-R, Max Operating Temperature=85°C, Min Operating Temperature=-40°C, Operating Supply Current=50mA, Operating Supply Voltage=3V, Package Quantity=1, Supplier Part Number 1=863-1349-1-ND, ComponentLink1Description=https://www.verical.com/server-webapp/html/getDatasheet?partID=660463&src-supplier=Verical, ComponentLink1URL=https://www.verical.com/server-webapp/html/getDatasheet?partID=660463&src-supplier=Verical, ComponentLink2Description=http://www.skyworksinc.com/uploads/documents/SE2435L_202412I.pdf?src-supplier=Digi-Key, ComponentLink2URL=http://www.skyworksinc.com/uploads/documents/SE2435L_202412I.pdf?src-supplier=Digi-Key, ComponentLink3Description=http://www.skyworksinc.com/uploads/documents/SE2435L_DS.pdf?src-supplier=Mouser, ComponentLink3URL=http://www.skyworksinc.com/uploads/documents/SE2435L_DS.pdf?src-supplier=Mouser, Packaging="Tape and Reel", Pricing 1="1 = 3.05000, 10 = 2.72600, 25 = 2.45320, 100 = 2.23510, 250 = 2.01704, 500 = 1.80990, 1000 = 1.52642 (USD)", RoHS=Yes, Stock 1=54229, Supplier 1=Digi-Key, Weight=0.032741oz

## Free pads (board coordinates)
  round 2.3 hole 2.6: 3(7.087,109.136) 3(31.284,109.162)

## Via types
v1: diameter 0.5, hole 0.3, Top Layer to Bottom Layer, tented both sides, 433 vias

## Nets (pads, with @x,y where several pads share a name; then routed paths per layer and width w, separated by ;. In a path a pad name is that pad's centre, name@x,y a point inside that pad or via, vN(x,y) a via of type N, cw(c..) or ccw(c..) an arc to the next point about the centre after c; other vN are vias at no path point)
1PPS: U3.9 U7.21 | length 11.9
  Top Layer w0.15: U3.9@18.6,50.528 18.6,50.158 19.558,49.2 19.558,46.272 19.279,45.993 v1(19.279,45.898) ; v1(18.675,42.642) 18.675,41.548 19.03,41.193 U7.21@20.643,41.193
  Bottom Layer w0.15: v1(18.675,42.642) 18.675,43.262 19.279,43.866 v1(19.279,45.898)
133M_OUT_EN: R22.2 U7.20 Y1.1 | length 26
  Top Layer w0.15: v1(6.68,55.499) 7.58,55.499 R22.2@7.602,55.477 ; v1@19.626,41.692 U7.20@20.642,41.692
  Top Layer w0.203: R22.2@7.602,55.477 Y1.1@7.602,56.728
  Bottom Layer w0.15: v1(6.68,55.499) 6.172,54.991 6.172,49.647 13.426,42.393 17.107,42.393 17.808,41.692 v1(19.625,41.692)
A_IQ_RX: RN1.4 U3.44 | length 8.1
  Top Layer w0.15: RN1.4@16.085,67.327 16.085,64.801 16.6,64.287 U3.44@16.6,59.428
A_IQ_TX: RN1.2 U3.46 | length 8.4
  Top Layer w0.15: RN1.2@14.415,67.327 14.415,64.782 15.6,63.597 U3.46@15.6,59.428
A_QI_RX: RN1.3 U3.45 | length 8.3
  Top Layer w0.15: RN1.3@15.215,67.327 15.215,64.769 16.1,63.885 U3.45@16.1,59.428
A_QI_TX: RN1.1 U3.47 | length 8.5
  Top Layer w0.15: RN1.1@13.545,67.327 13.545,64.758 15.1,63.203 U3.47@15.1,59.428
B_IQ_RX: RN2.4 U3.35 | length 12.8
  Top Layer w0.2: 21.1,61.519 21.1,62.502 22.606,64.008 26.645,64.008 27.286,64.649 RN2.4@27.286,67.327
  Top Layer w0.203: U3.35@21.1,59.428 21.1,61.519
B_QI_RX: RN2.3 U3.36 | length 12.6
  Top Layer w0.2: 20.6,61.947 20.6,63.272 21.768,64.44 25.76,64.44 26.416,65.096 RN2.3@26.416,67.327
  Top Layer w0.203: U3.36@20.6,59.428 20.6,61.947
CLKHS: R19.2 U3.53 | length 1.9
  Top Layer w0.2: R19.2@12.057,56.768 12.097,56.728 U3.53@13.9,56.728
CLKI: R14.2 U4.11 | length 3.8
  Top Layer w0.15: R14.2@12.548,68.674 12.548,69.71 14.059,71.221 U4.11@14.059,71.856
CLKO_B: R16.2 R18.1 U6.10 | length 5.9
  Top Layer w0.2: R18.1@22.555,68.725 R16.2@23.571,68.725 23.571,70.009 24.174,70.612 25.449,70.612 26.004,71.167 U6.10@26.004,71.856
CLKO_B_32M: R16.1 U7.5 | length 25.5
  Top Layer w0.25: v1@23.571,67.056 R16.1@23.571,67.825 ; U7.5@24.793,45.843 24.793,47.533 v1(27.051,49.791)
  Bottom Layer w0.25: v1(23.571,67.031) 25.502,67.031 27.051,65.481 v1(27.051,49.791)
FEM_EN: C62.2 R20.2 R21.2 U2.4 U5.1 | length 12.1
  Top Layer w0.25: v1(11.506,88.57) 12.852,88.57 15.926,91.643 U5.1@16.458,91.643
  Bottom Layer w0.25: v1(7.036,85.268) 8.204,85.268 v1(11.506,88.57)